# Altium PCB avroscope.PcbDoc
Units mil, origin at the board's own origin, x right, y up, seen from the top; angles counter-clockwise.
Board outline 5150 x 3650 mil, 2 copper layers (Top Layer, Bottom Layer); 52 components, 63 nets, 220 pads, 0 vias.
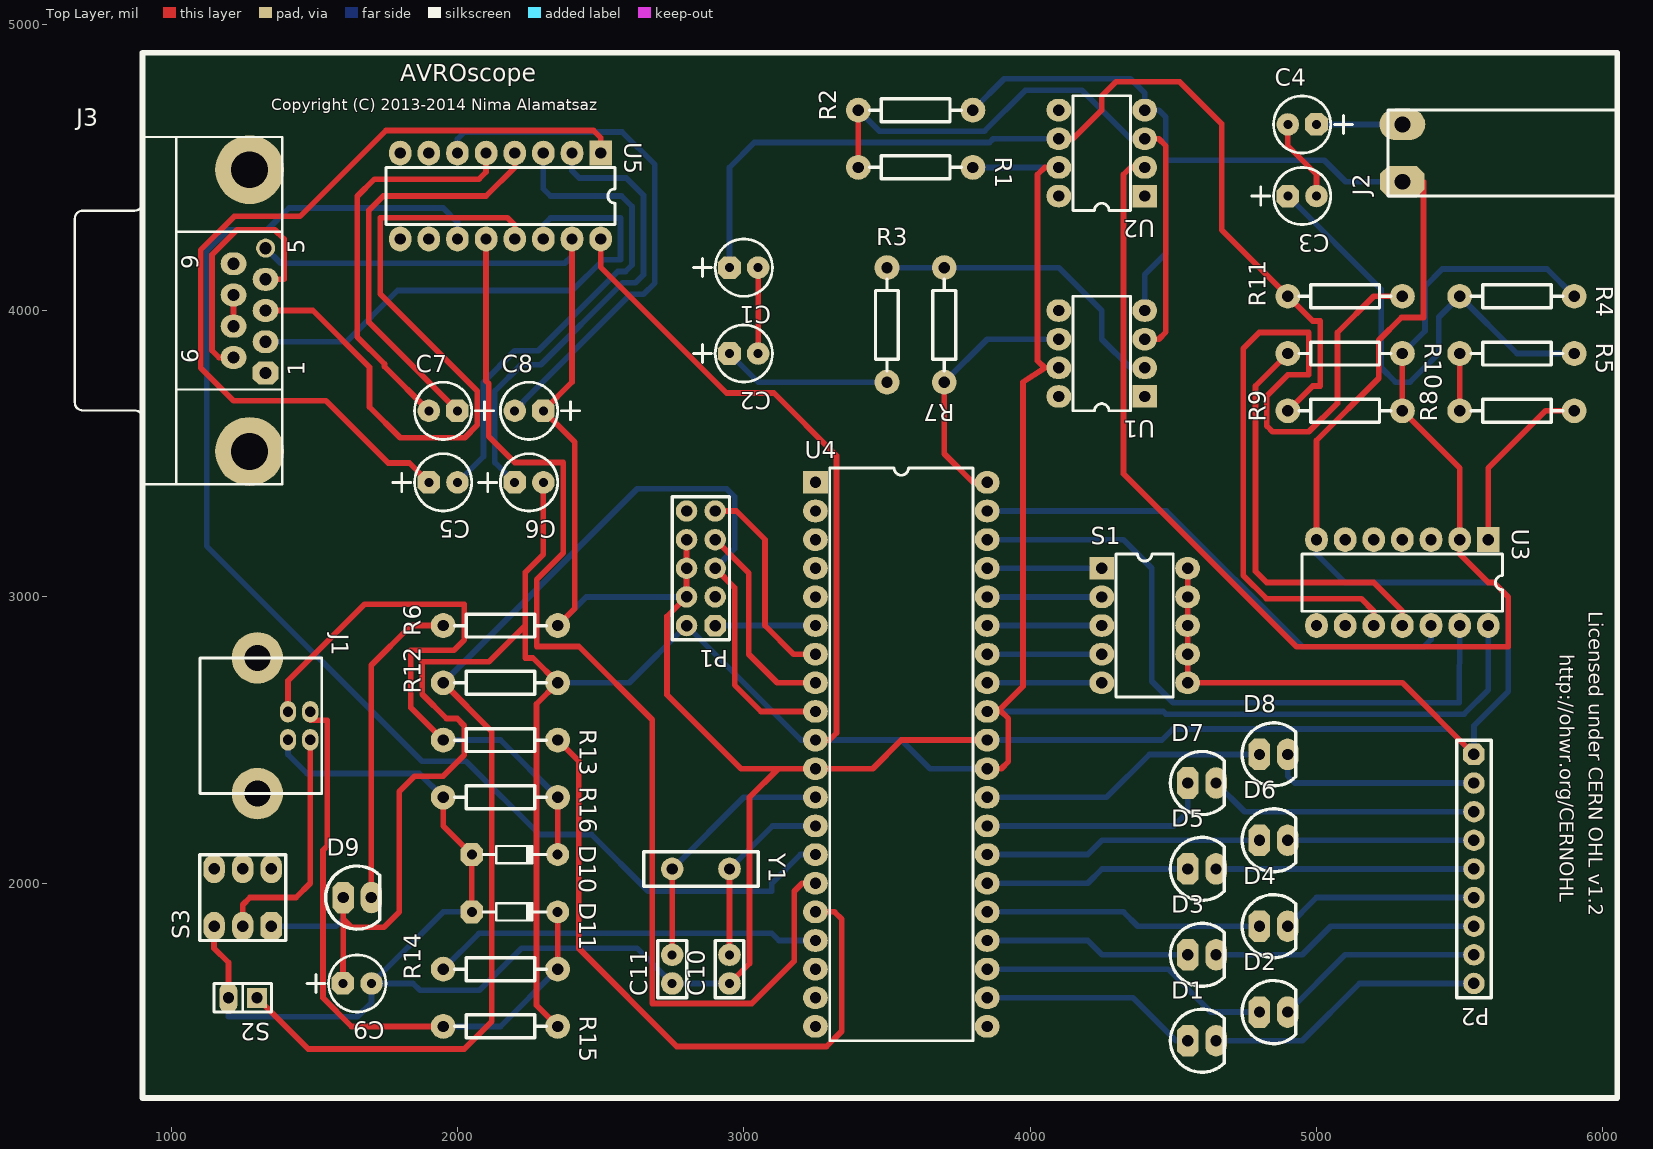
[diagram p0: Top Layer view]
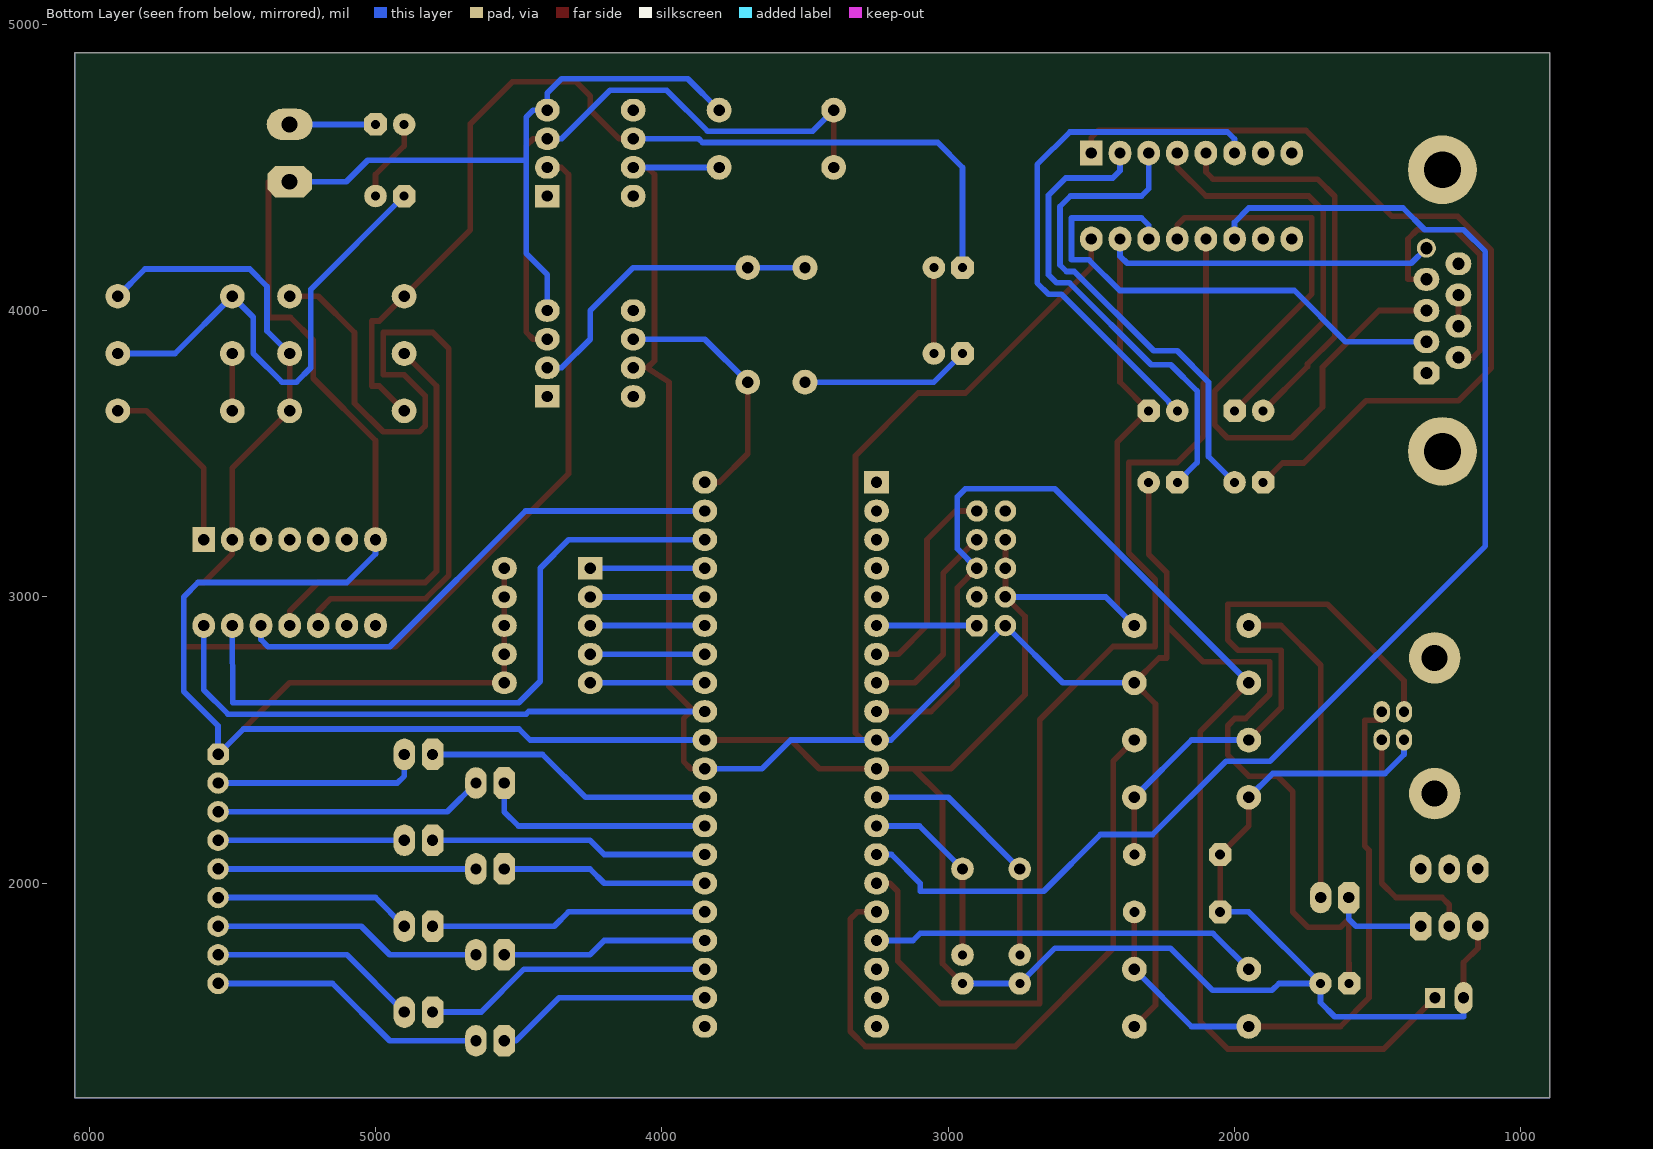
[diagram p1: Bottom Layer view, seen from below]

## Layer stack, top to bottom
Top Layer: signal copper 1.4
Dielectric: dielectric 12.6, FR-4, Dk 4.8
Bottom Layer: signal copper 1.4

## Board outline
900,4900 6050,4900 6050,1250 900,1250

## Design rules (kind name [scope] priority, off if disabled: settings)
Clearance Clearance_1 [(IsRegion AND InNet('GND'))] p1: gap=35
Clearance [All] p2: gap=20
HoleSize [All] p1: absolutevalues=TRUE maxlimit=150 minlimit=1 maxpercent=80.000 minpercent=20.000
PlaneClearance [All] p1: clearance=25
PlaneConnect [All] p1: planeconnectstyle=Relief reliefexpansion=25 reliefentries=4 reliefconductorwidth=20 reliefairgap=25
PolygonConnect [All] p1: connectstyle=Relief reliefconductorwidth=20 reliefentries=4 polygonreliefangle="90 Angle" airgapwidth=10
RoutingVias [All] p1: holewidth=28 width=50 viastyle="Through Hole" minholewidth=28 minwidth=50 maxholewidth=28 maxwidth=50
SilkToSilkClearance [All] p1: silktosilkclearance=0
SilkToSolderMaskClearance SilkscreenOverComponentPads [IsPad] p1: minsilkscreentomaskgap=0 clearancetoexposedcopper=TRUE
SolderMaskExpansion [All] p1: expansion=4
Width [All] p1: maxlimit=20 minlimit=20 preferedwidth=20 minimp=50.000000 maximp=50.000000 favimp=50.000000
23 further rules are at their usual default settings.

## Components (designator, comment, footprint, x,y, rotation, side; value= is the part's Value field where it differs from the comment)
C1 "Cap Pol1" RB.1/.2 3000,4150 r180 top
C2 "Cap Pol1" RB.1/.2 3000,3850 r180 top
C3 "Cap Pol1" RB.1/.2 4950,4400 r180 top
C4 "Cap Pol1" RB.1/.2 4950,4650 r0 top
C5 "Cap Pol1" RB.1/.2 1950,3400 r180 top
C6 "Cap Pol1" RB.1/.2 2250,3400 r180 top
C7 "Cap Pol1" RB.1/.2 1950,3650 r0 top
C8 "Cap Pol1" RB.1/.2 2250,3650 r0 top
C9 "Cap Pol1" RB.1/.2 1650,1650 r180 top
C10 "Cap" RAD0.1 2950,1700 r90 top
C11 "Cap" RAD0.1 2750,1700 r90 top
D1 "LED1" "LED .1" 4600,1450 r0 top
D2 "LED1" "LED .1" 4850,1550 r0 top
D3 "LED1" "LED .1" 4600,1750 r0 top
D4 "LED1" "LED .1" 4850,1850 r0 top
D5 "LED1" "LED .1" 4600,2050 r0 top
D6 "LED1" "LED .1" 4850,2150 r0 top
D7 "LED1" "LED .1" 4600,2350 r0 top
D8 "LED1" "LED .1" 4850,2450 r0 top
D9 "LED1" "LED .1" 1650,1950 r0 top
D10 "3.6" "DIODE .3 .03" 2200,2100 r0 top
D11 "3.6" "DIODE .3 .03" 2200,1900 r0 top
J1 "USB B HEADER" USB-B 1300,2550 r270 top
J2 "CON2" "HEADER2 .2 .055" 5650,4550 r90 top
J3 "D Connector 9" DB9 1200,4000 r90 top
P1 "Header 5X2" ISP 2800,3100 r180 top
P2 "Header 9" SIL.1/9 5550,2450 r270 top
R1 "Res1" AXIAL0.4 3600,4500 r0 top
R2 "Res1" AXIAL0.4 3600,4700 r180 top
R3 "Res1" AXIAL0.4 3500,3950 r90 top
R4 "Res1" AXIAL0.4 5700,4050 r0 top
R5 "Res1" AXIAL0.4 5700,3850 r0 top
R6 "Res1" AXIAL0.4 2150,2900 r180 top
R7 "Res1" AXIAL0.4 3700,3950 r270 top
R8 "Res1" AXIAL0.4 5700,3650 r180 top
R9 "Res1" AXIAL0.4 5100,3650 r180 top
R10 "Res1" AXIAL0.4 5100,3850 r0 top
R11 "Res1" AXIAL0.4 5100,4050 r180 top
R12 "Res1" AXIAL0.4 2150,2700 r180 top
R13 "Res1" AXIAL0.4 2150,2500 r0 top
R14 "Res1" AXIAL0.4 2150,1700 r180 top
R15 "Res1" AXIAL0.4 2150,1500 r0 top
R16 "Res1" AXIAL0.4 2150,2300 r0 top
S1 "SW DIP-5" DIP10E 4400,2900 r0 top
S2 "SW-PB" SIP2 1300,1600 r180 top
S3 "SW-SPDT" "SW DPDT" 1250,1950 r90 top
U1 "LF351" DIP8e 4250,3850 r180 top
U2 "LF351" DIP8e 4250,4550 r180 top
U3 "4066" DIP14e 5300,3050 r270 top
U4 "ATmega32-16PI" DIP40E-600 3550,2450 r0 top
U5 "MAX232ACPE" DIP16e 2150,4400 r270 top
Y1 "16MHz" XTAL1 2750,2050 r0 top

## Footprints (in the part's own frame and the unit in brackets; to place one, negate y for a bottom-side part, rotate by r counter-clockwise, add the part's x,y. Pads: shape width x height; smd on the part's side, far side on the other; paste and mask are expansions set on the pad)
AXIAL0.4 [mm]
  round 2.2 hole 1: 1(-5.08,0) 2(5.08,0)
  silkscreen extent -4.06,-1.02 4.06,1.02
DB9 [mm]
  oct 2.032x2.286 hole 1.09: 1(-5.54,-3.3)
  oval 2.032x2.286 hole 1.09: 2(-2.77,-3.3) 3(0,-3.3) 4(2.77,-3.3) 6(-4.155,-0.46) 7(-1.385,-0.46) 8(1.385,-0.46) 9(4.155,-0.46)
  round 1.69 hole 1.09: 5(5.54,-3.3)
  round 6.096 hole 3.26: 10(-12.495,-1.88) 11(12.495,-1.88)
  silkscreen extent -15.4,-4.78 15.4,13.62
"DIODE .3 .03" [mil]
  oct 80x80 hole 35: 1(-150,0)
  round 80 hole 35: 2(150,0)
  silkscreen extent -110,-30 110,30, body extent -158,-33 158,33, height 103
DIP8e [mm]
  rect 2.2x2 hole 1: 1(-3.81,3.81)
  oval 2.2x2 hole 1: 2(-3.81,1.27) 3(-3.81,-1.27) 4(-3.81,-3.81) 5(3.81,-3.81) 6(3.81,-1.27) 7(3.81,1.27) 8(3.81,3.81)
  silkscreen extent -2.54,-5.08 2.54,5.08
DIP10E [mm]
  rect 2.2x2 hole 1: 1(-3.81,5.08)
  oval 2.2x2 hole 1: 2(-3.81,2.54) 3(-3.81,0) 4(-3.81,-2.54) 5(-3.81,-5.08) 6(3.81,-5.08) 7(3.81,-2.54) 8(3.81,0) 9(3.81,2.54) 10(3.81,5.08)
  silkscreen extent -2.54,-6.35 2.54,6.35
DIP14e [mm]
  rect 2.2x2 hole 1: 1(-3.81,7.62)
  oval 2.2x2 hole 1: 2(-3.81,5.08) 3(-3.81,2.54) 4(-3.81,0) 5(-3.81,-2.54) 6(-3.81,-5.08) 7(-3.81,-7.62) 8(3.81,-7.62) 9(3.81,-5.08) 10(3.81,-2.54) 11(3.81,0) 12(3.81,2.54) 13(3.81,5.08) 14(3.81,7.62)
  silkscreen extent -2.54,-8.89 2.54,8.89
DIP16e [mm]
  rect 2.2x2 hole 1: 1(-3.81,8.89)
  oval 2.2x2 hole 1: 2(-3.81,6.35) 3(-3.81,3.81) 4(-3.81,1.27) 5(-3.81,-1.27) 6(-3.81,-3.81) 7(-3.81,-6.35) 8(-3.81,-8.89) 9(3.81,-8.89) 10(3.81,-6.35) 11(3.81,-3.81) 12(3.81,-1.27) 13(3.81,1.27) 14(3.81,3.81) 15(3.81,6.35) 16(3.81,8.89)
  silkscreen extent -2.54,-10.16 2.54,10.16
DIP40E-600 [mm]
  rect 2.2x2 hole 1: 1(-7.62,24.13)
  oval 2.2x2 hole 1: 2(-7.62,21.59) 3(-7.62,19.05) 4(-7.62,16.51) 5(-7.62,13.97) 6(-7.62,11.43) 7(-7.62,8.89) 8(-7.62,6.35) 9(-7.62,3.81) 10(-7.62,1.27) 11(-7.62,-1.27) 12(-7.62,-3.81) 13(-7.62,-6.35) 14(-7.62,-8.89) 15(-7.62,-11.43) 16(-7.62,-13.97) 17(-7.62,-16.51) 18(-7.62,-19.05) 19(-7.62,-21.59) 20(-7.62,-24.13) 21(7.62,-24.13) 22(7.62,-21.59) 23(7.62,-19.05) 24(7.62,-16.51) 25(7.62,-13.97) 26(7.62,-11.43) 27(7.62,-8.89) 28(7.62,-6.35) 29(7.62,-3.81) 30(7.62,-1.27) 31(7.62,1.27) 32(7.62,3.81) 33(7.62,6.35) 34(7.62,8.89) 35(7.62,11.43) 36(7.62,13.97) 37(7.62,16.51) 38(7.62,19.05) 39(7.62,21.59) 40(7.62,24.13)
  silkscreen extent -6.35,-25.4 6.35,25.4
"HEADER2 .2 .055" [mil]
  oct 110x155 hole 55: 1(-100,350)
  oval 110x160 hole 55: 2(100,350)
  silkscreen extent -150,-400 150,400, body extent -150,-400 150,400, height 580
ISP [mil]
  oct 75x75 hole 40: 1(-100,200)
  round 75 hole 40: 2(0,200) 3(-100,100) 4(0,100) 5(-100,0) 6(0,0) 7(-100,-100) 8(0,-100) 9(-100,-200) 10(0,-200)
  silkscreen extent -150,-250 50,250
"LED .1" [mm]
  oct 1.905x2.8 hole 1: 1(-1.25,0)
  oval 1.905x2.8 hole 1: 2(1.25,0)
  silkscreen extent -2.8,-2.8 1.98,2.8
RAD0.1 [mm]
  round 2 hole 0.8: 1(-1.27,0) 2(1.27,0)
  silkscreen extent -2.54,-1.27 2.54,1.27
RB.1/.2 [mm]
  oct 2x2 hole 0.8: 1(1.27,0)
  round 2 hole 0.8: 2(-1.27,0)
  silkscreen extent -2.54,-2.54 4.47,2.54
SIL.1/9 [mil]
  oct 75x75 hole 40: 1(0,0)
  round 75 hole 40: 2(100,0) 3(200,0) 4(300,0) 5(400,0) 6(500,0) 7(600,0) 8(700,0) 9(800,0)
  silkscreen extent -50,-60 850,60
SIP2 [mm]
  rect 1.778x1.778 hole 1: 1(0,0)
  oval 1.6x2.8 hole 1: 2(2.54,0)
  silkscreen extent -1.27,-1.27 3.81,1.27
"SW DPDT" [mil]
  oct 100x75 hole 40: 1(-100,-100)
  oval 100x75 hole 40: 2(-100,0) 3(-100,100) 4(100,100) 5(100,0) 6(100,-100)
  silkscreen extent -150,-150 150,150
USB-B [mil]
  oval 75x57 hole 36: 1(49,186) 2(-49,186) 3(-49,108) 4(49,108)
  round 180 hole 91: 5(-237,1) 6(237,1)
  silkscreen extent -237,-199 237,226
XTAL1 [mm]
  round 2 hole 1: 1(0,0) 2(5.08,0)
  silkscreen extent -2.54,-1.52 7.62,1.52

## Part data
C1 C2 C3 C4 C5 C6 C7 C8 C9: "Polarized Capacitor (Radial)"
C10 C11: "Capacitor"
D1 D2 D3 D4 D5 D6 D7 D8 D9: "Typical RED GaAs LED"
D10 D11: library part "D Zener", "Zener Diode"
J1: library part D-300-0000, "Connector, USB B Type, Right Angle, Thru Hole, White"
J2: "Connector"
J3: "Receptacle Assembly, 9 Position, Right Angle"
P1: "Header, 5-Pin, Dual row"
P2: "Header, 9-Pin"
R1 R2 R3 R4 R5 R6 R7 R8 R9 R10 R11 R12 R13 R14 R15 R16: "Resistor"
S1: "DIP Switch, 5 Position, SPST"
S2: "Switch"
S3: "SPDT Subminiature Toggle Switch, Right Angle Mounting, Vertical Actuation"
U1 U2: library part 741
U4: "8-Bit AVR Microcontroller with 32K Bytes of In-System Programmable Flash Memory"
U5: "+5V Powered, Multi-Channel RS-232 Driver/Receiver"
Y1: library part XTAL, "Crystal Oscillator"

## Nets (pads, with @x,y where several pads share a name; then routed paths per layer and width w, separated by ;. In a path a pad name is that pad's centre, name@x,y a point inside that pad or via, vN(x,y) a via of type N, cw(c..) or ccw(c..) an arc to the next point about the centre after c; other vN are vias at no path point)
GND: C8.1 C9.2 C10.1 C11.1 D10.1 D11.1 J1.4 J2.1 J3.5 P1.4 P1.6 P1.8 P2.1 R2.1 R6.1 R16.1 S1.6 S1.7 S1.8 S1.9 S1.10 S2.2 S3.3 U1.4 U2.4 U3.7 U4.11 U4.31 U5.15 | length 18152.5
  Top Layer w20: S3.3 1150,1773 1200,1723 S2.2 ; R16.1 1950,2200 D10.1 D11.1 ; R6.1 2409.37,2959.37 2409.37,3540.63 C8.1 2400,3750 U5.15 ; P1.8 P1.6 P1.4 2732,2932 2732,2658 2990,2400 3120,2400 ; C10.1 3020,1720 3020,2300 3120,2400 ; U4.31 3550,2500 3450,2400 U4.11 3120,2400 ; S1.10 S1.9 S1.8 S1.7 S1.6 5300,2700 P2.1 ; U3.7 5000,3546 5217.38,3763.38 5217.38,3896.38 5297,3976 5374,3976 5374,4450 J2.1
  Bottom Layer w20: S2.2 1200,1534 1650,1534 1700,1584 C9.2 ; J3.5 1383.03,4165 2375,4165 2400,4190 U5.15 ; J1.4 1408,2450 1474.65,2383.35 1866.65,2383.35 R16.1 ; D11.1 1950,1900 C9.2 ; R6.1 2450,3000 P1.4 ; C10.1 C11.1 2626.69,1773.31 2224.31,1773.31 2077,1626 1869,1626 1845,1650 C9.2 ; R2.1 3909.37,4809.37 4350,4809.37 4400,4759.37 U2.4 4449,4700 4474,4675 4474,4525 ; U4.31 4460,2500 4499,2539 5461,2539 P2.1 5550,2550 5670,2670 5670,3000 5620,3050 5100,3050 5000,3150 U3.7 ; U1.4 4400,4126 4474,4200 4474,4525 ; J2.1 5102,4450 5027,4525 4474,4525
NetC1_1: C1.1 R9.2 R11.2 U2.6 | length 3505.2
  Top Layer w20: U2.6 4150,4600 4250,4700 4250,4749 4300,4799 4522,4799 4669,4652 4669,4281 R11.2 4986.69,3963.31 5013.31,3963.31 5013.31,3736.69 4986.69,3736.69 R9.2
  Bottom Layer w20: C1.1 2950,4500 3036.69,4586.69 3857.69,4586.69 3871,4600 U2.6
NetC1_2: C1.2 C2.2 | length 300
  Top Layer w20: C2.2 C1.2
NetC2_1: C2.1 R3.1 | length 591.4
  Bottom Layer w20: C2.1 3050,3750 R3.1
NetC3_1: C3.1 R4.1 R5.2 | length 1711.1
  Bottom Layer w20: C3.1 5226,4074 5226,3800 5276,3750 5326.69,3750 5426.69,3850 5426.69,3976.69 R4.1 5700,3850 R5.2
NetC3_2: C3.2 C4.2 | length 291.4
  Top Layer w20: C4.2 4900,4575 5000,4475 C3.2
NetC4_1: C4.1 J2.2 | length 300
  Bottom Layer w20: C4.1 J2.2
NetC5_1: C5.1 U5.1 | length 3008.5
  Top Layer w20: C5.1 1832,3468 1758,3468 1541,3685 1218,3685 1103,3800 1103,4211.57 1220.43,4329 1450,4329 1750,4629 2475,4629 2500,4604 U5.1
NetC5_2: C5.2 U5.3 | length 1739.8
  Bottom Layer w20: C5.2 2090.63,3490.63 2090.63,3749.97 2200,3859.34 2282.34,3859.34 2559.69,4136.69 2586.87,4136.69 2609.37,4159.2 2609.37,4363.31 2572.68,4400 2325,4400 2300,4425 U5.3
NetC6_1: C6.1 U5.2 | length 1659.2
  Bottom Layer w20: C6.1 2130.63,3469.37 2130.63,3719 2222.63,3811 2290.57,3811 2576.26,4096.69 2621.06,4096.69 2649.37,4125 2649.37,4403 2589.37,4463 2425,4463 2400,4488 U5.2
NetC7_1: C7.1 U5.4 | length 1449.7
  Top Layer w20: C7.1 1690.63,3959.37 1690.63,4350 1740.63,4400 2100,4400 2200,4500 U5.4
NetC7_2: C7.2 U5.5 | length 1403.8
  Top Layer w20: C7.2 1745,3805 1745,3813 1650,3908 1650,4399 1710,4459 2075,4459 2100,4484 U5.5
NetC8_2: C8.2 U5.6 | length 1885
  Bottom Layer w20: U5.6 2000,4599 2025,4624 2575,4624 2689.37,4509.63 2689.37,4096.06 2650,4056.69 2604.69,4056.69 2230,3682 2230,3680 C8.2
NetC10_2: C10.2 U4.13 Y1.2 | length 662.1
  Top Layer w20: C10.2 Y1.2
  Bottom Layer w20: Y1.2 3100,2200 U4.13
NetC11_2: C11.2 U4.12 Y1.1 | length 903.6
  Top Layer w20: C11.2 Y1.1
  Bottom Layer w20: Y1.1 3000,2300 U4.12
NetD1_1: D1.1 U4.22 | length 762.9
  Bottom Layer w20: U4.22 4359,1600 4509,1450 D1.1
NetD1_2: D1.2 P2.9 | length 983.6
  Bottom Layer w20: D1.2 4950,1450 5150,1650 P2.9
NetD2_1: D2.1 U4.23 | length 1012.9
  Bottom Layer w20: U4.23 4481,1700 4631,1550 D2.1
NetD2_2: D2.2 P2.8 | length 732.8
  Bottom Layer w20: D2.2@4900,1550 5100,1750 P2.8
NetD3_1: D3.1 U4.24 | length 721.5
  Bottom Layer w20: U4.24 4201,1800 4251,1750 D3.1
NetD3_2: D3.2 P2.7 | length 942.2
  Bottom Layer w20: D3.2 4950,1750 5050,1850 P2.7
NetD4_1: D4.1 U4.25 | length 971.5
  Bottom Layer w20: U4.25 4326,1900 4376,1850 D4.1
NetD4_2: D4.2 P2.6 | length 691.4
  Bottom Layer w20: D4.2@4900,1850 5000,1950 P2.6
NetD5_1: D5.1 U4.26 | length 721.5
  Bottom Layer w20: U4.26 4201,2000 4251,2050 D5.1
NetD5_2: D5.2 P2.5 | length 900.8
  Bottom Layer w20: D5.2 P2.5
NetD6_1: D6.1 U4.27 | length 971.5
  Bottom Layer w20: U4.27 4201,2100 4251,2150 D6.1
NetD6_2: D6.2 P2.4 | length 650.8
  Bottom Layer w20: D6.2 P2.4
NetD7_1: D7.1 U4.28 | length 821.5
  Bottom Layer w20: U4.28 4500.79,2200 4550.79,2250 D7.1
NetD7_2: D7.2 P2.3 | length 942.2
  Bottom Layer w20: D7.2 4749.21,2250 P2.3
NetD8_1: D8.1 U4.29 | length 1012.9
  Bottom Layer w20: U4.29 4267,2300 4417,2450 D8.1
NetD8_2: D8.2 P2.2 | length 736.1
  Bottom Layer w20: D8.2 4899.21,2375 4924.21,2350 P2.2
NetD9_2: D9.2 R6.2 | length 1119.6
  Top Layer w20: D9.2 1699.21,2761.43 1837.78,2900 R6.2
NetD10_2: D10.2 J1.3 R13.1 R16.2 | length 2204.2
  Top Layer w20: J1.3 1408,2707 1675,2974 2024,2974 2024,2850 1987.31,2813.31 1836.69,2813.31 1836.69,2613.31 R13.1 ; D10.2 R16.2
  Bottom Layer w20: R13.1 2150,2500 R16.2
NetD11_2: D11.2 J1.2 R14.1 R15.1 | length 2208.5
  Top Layer w20: J1.2 1486,2569 1545,2569 1545,2130 1530,2115 1530,1600 1630,1500 R15.1 ; R14.1 D11.2
  Bottom Layer w20: R15.1 2150,1500 R14.1
NetJ1_1: J1.1 S3.2 | length 843.1
  Top Layer w20: S3.2 1250,1925 1275,1950 1436,1950 1486,2000 J1.1
NetJ3_2: J3.2 U5.14 | length 1832.3
  Bottom Layer w20: J3.2 1611.94,3890.94 1791,4070 2401,4070 2508,4177 2569.37,4177 2569.37,4323.31 2325,4323.31 2300,4298.31 U5.14
NetJ3_3: J3.3 U5.13 | length 2416.1
  Top Layer w20: J3.3 1495,4000 1693,3802 1693,3663 1800,3556 2025.37,3556 2069.37,3600 2069.37,3719 1730.63,4057.74 1730.63,4324 2175,4324 2200,4299 U5.13
NetJ3_4: J3.4 J3.6 | length 924.9
  Top Layer w20: J3.6 1167,3836.42 1143,3860.42 1143,4195 1230,4282 1362,4282 1394,4250 1394,4109.06 J3.4
NetJ3_7: J3.7 J3.8 | length 109.1
  Top Layer w20: J3.7 J3.8
NetP1_1: P1.1 U4.6 | length 350
  Bottom Layer w20: P1.1 U4.6
NetP1_5: P1.5 R12.2 S2.1 U4.9 | length 4532.2
  Top Layer w20: S2.1 1479,1421 2024,1421 2120,1517 2120,2530 R12.2 ; P1.5 2968,3032 2968,2692 3060,2600 U4.9
  Bottom Layer w20: R12.2 2628,3378 2940,3378 2968,3350 2968,3168 P1.5
NetP1_7: P1.7 U4.8 | length 722.9
  Top Layer w20: P1.7 3017,3083 3017,2800 3117,2700 U4.8
NetP1_9: P1.9 U4.7 | length 732.8
  Top Layer w20: P1.9 2974,3300 3074,3200 3074,2900 3174,2800 U4.7
NetR1_1: R1.1 R2.2 U1.3 U2.3 | length 2178.3
  Top Layer w20: R1.1 R2.2 ; U1.3 4449,3900 4474,3925 4474,4575 4449,4600 U2.3
  Bottom Layer w20: R2.2 3473.31,4626.69 3840.69,4626.69 3983.37,4769.37 4180.63,4769.37 4350,4600 U2.3
NetR3_2: R3.2 R7.1 U1.2 | length 1103.6
  Bottom Layer w20: R3.2 R7.1 4100,4150 4250,4000 4250,3900 4350,3800 U1.2
NetR4_2: R4.2 R9.1 R10.2 U2.2 U3.2 | length 4765.2
  Top Layer w20: U2.2 4351,4500 4326,4475 4326,3430 4930,2826 5670,2826 5670,3000 5620,3050 5600,3050 5500,3150 U3.2 5500,3450 R9.1 R10.2
  Bottom Layer w20: R10.2 5378.67,3928.67 5378.67,4084.3 5439.37,4145 5805,4145 R4.2
NetR5_1: R5.1 R8.2 | length 200
  Top Layer w20: R8.2 R5.1
NetR7_2: R7.2 U1.6 U4.40 | length 903.6
  Top Layer w20: R7.2 3700,3500 3800,3400 U4.40
  Bottom Layer w20: R7.2 3850,3900 U1.6
NetR8_1: R8.1 U3.1 | length 632.8
  Top Layer w20: U3.1 5600,3450 5800,3650 R8.1
NetR10_1: R10.1 U3.11 | length 1428.6
  Top Layer w20: R10.1 4786.69,3736.69 4786.69,3089.31 4826,3050 5200,3050 5300,2950 U3.11
NetR11_1: R11.1 U3.10 | length 2855
  Top Layer w20: U3.10 5200,2950 5156,2994 4825,2994 4744,3075 4744,3867.31 4800,3923.31 4973.31,3923.31 4973.31,3776 4900,3776 4826.69,3702.69 4826.69,3596.59 4846.59,3576.69 4973.31,3576.69 5073,3676.38 5073,3923 5200,4050 R11.1
NetR13_2: R13.2 U4.16 | length 2334.6
  Top Layer w20: R13.2 2423.31,2426.69 2423.31,1772.69 2766,1430 3289,1430 3342,1483 3342,1875 3317,1900 U4.16
NetR14_2: R14.2 U4.17 | length 1362.1
  Bottom Layer w20: R14.2 2075,1825 3098,1825 3123,1800 U4.17
NetS1_1: S1.1 U4.37 | length 400
  Bottom Layer w20: U4.37 S1.1
NetS1_2: S1.2 U4.36 | length 400
  Bottom Layer w20: U4.36 S1.2
NetS1_3: S1.3 U4.35 | length 400
  Bottom Layer w20: U4.35 S1.3
NetS1_4: S1.4 U4.34 | length 400
  Bottom Layer w20: U4.34 S1.4
NetS1_5: S1.5 U4.33 | length 400
  Bottom Layer w20: U4.33 S1.5
NetU3_12: U3.12 U4.39 | length 1805.7
  Bottom Layer w20: U4.39 4476,3300 4950,2826 5375,2826 5400,2851 U3.12
NetU3_13: U3.13 U4.38 | length 2384.9
  Bottom Layer w20: U4.38 4325,3200 4425,3100 4425,2705.63 4500,2630.63 5498.63,2630.63 U3.13
NetU4_14: U4.14 U5.11 | length 4740.6
  Bottom Layer w20: U5.11 2000,4308 1950,4358 1412,4358 1336,4282 1200,4282 1124,4206 1124,3178 1876,2426 2030,2426 2286,2170 2468,2170 2666,1972 3098,1972 3098,2000 3198,2100 U4.14
NetU4_15: U4.15 U5.12 | length 4059.4
  Top Layer w20: U5.12 2100,3754.37 2109.37,3745 2109.37,3560 2200,3469.37 2369.37,3469.37 2369.37,3153.37 2276.69,3060.69 2276.69,2826.69 2424,2826.69 2680,2570.69 2680,1580 3028,1580 3176,1728 3176,1972 3204,2000 U4.15
VCC: C6.2 C9.1 D9.1 P1.2 R1.2 R12.1 R15.2 S3.1 U1.7 U2.7 U3.14 U4.10 U4.30 U4.32 U5.16 | length 13500.9
  Top Layer w20: C9.1 1600.79,1799.79 1600.79,1875 ; C6.2 2300,3149 2236.69,3085.69 ; R15.2 2276,1574 2276,2626 R12.1 2263.31,2786.69 2236.69,2786.69 2236.69,2900 ; U5.16 2500,4152 2940,3712 3105,3712 3324,3493 3324,2525 3299,2500 U4.10 ; U4.30 3899,2400 3924,2425 3924,2575 3899,2600 U4.32@3887,2600 ; U1.7 4051,3800 ; U2.7 4051,4500 4026,4475 4026,3825 4051,3800 ; 1600.79,1875 D9.1 1600.79,1875 ; 1600.79,1875 1629.79,1846 1743,1846 1797,1900 1797,2320 1851,2374 1950,2374 2024,2448 2024,2550 1999,2575 1962,2575 1876.69,2660.31 1876.69,2773.31 2110,2773.31 2236.69,2900 ; 2236.69,2900 2236.69,3085.69 ; 2236.69,2900 2236.69,3085.69 ; U4.32@3887,2600 U4.32 U4.32@3887,2600 ; U4.32@3887,2600 3975,2688 3975,3750 4051,3800
  Bottom Layer w20: S3.1 1575.79,1850 1600.79,1875 D9.1 ; R12.1 2600,2700 P1.2 3200,2500 U4.10 3550,2500 3650,2400 U4.30 ; R1.2 U2.7 ; U4.32 4464.63,2600 4474,2590.63 5515.63,2590.63 5600,2675 U3.14
pads on no net: J1.5 J1.6 J3.1 J3.9 J3.10 J3.11 P1.3 P1.10 S3.4 S3.5 S3.6 U1.1 U1.5 U1.8 U2.1 U2.5 U2.8 U3.3 U3.4 U3.5 U3.6 U3.8 U3.9 U4.1 U4.2 U4.3 U4.4 U4.5 U4.18 U4.19 U4.20 U4.21 U5.7 U5.8 U5.9 U5.10

## Polygon pours and split planes (outlines as drawn)
GND on Bottom Layer "Bottom" (solid, remove dead copper, shelved, pour order 1000): 900,4900 6050,4900 6050,1250 900,1250
GND on Top Layer "Top" (solid, remove dead copper, shelved, pour order 1001): 900,4900 6050,4900 6050,1250 900,1250

## Silkscreen, mask and mechanical layers (free items; w line width, h text height)
Top Overlay:
  the board outline again, w20
  text "AVROscope" at 1800,4800 h60
  text "Copyright (C) 2013-2014 Nima Alamatsaz" at 1350,4700 h40
  text "Licensed under CERN OHL v1.2" at 5950,2950 h50 r270
  text "http://ohwr.org/CERNOHL" at 5850,2800 h50 r270

## Text inside footprints (layer, text, board x,y; h text height)
J3: Top Overlay "6" at 1095.87,3816.73 h59.06 r90; Top Overlay "9" at 1095.87,4143.9 h59.06 r90; Top Overlay "5" at 1465.94,4198.43 h59.06 r90; Top Overlay "1" at 1465.94,3772.05 h59.06 r90